# EAGLE board Micro-OLED_I2C_Mill_Humid_Test (EAGLE 7.6.0)
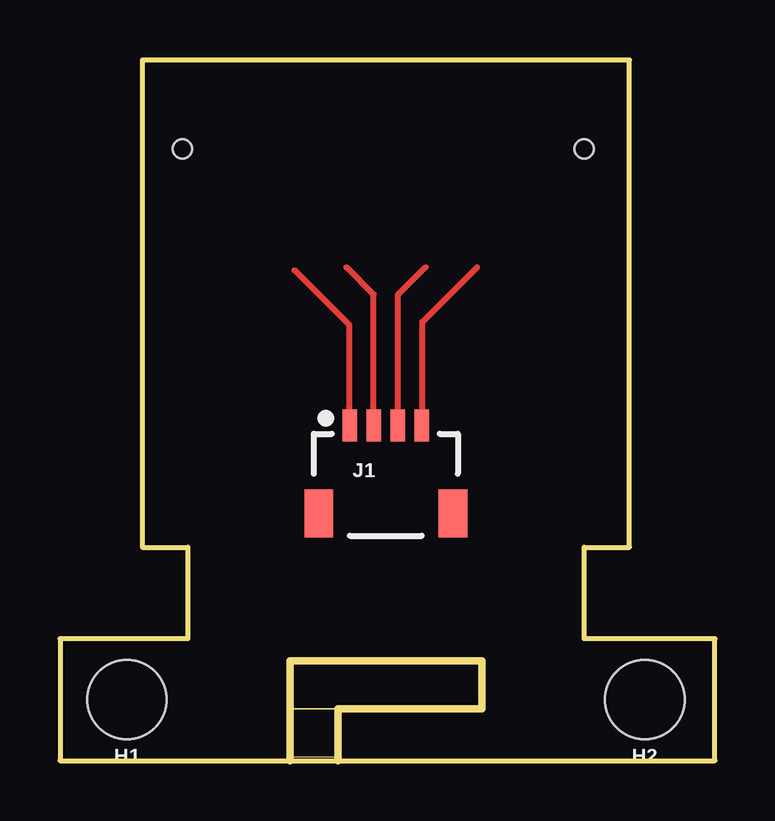
[diagram p0: board, top side]
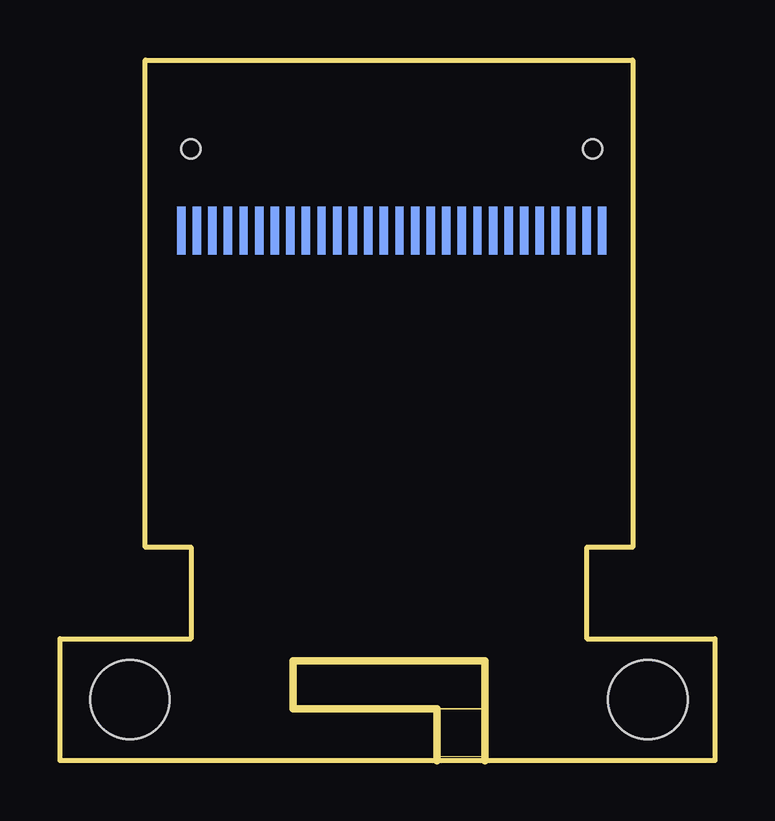
[diagram p1: board, bottom side, seen from below]

Size 27.3 x 29.21 mm. Coordinates in mm from the lower left corner, seen from the top.
Outline: 3.43,29.21 3.43,8.89 5.33,8.89 5.33,5.08 0,5.08 0,0 27.3,0 27.3,5.08 21.84,5.08 21.84,8.89 23.75,8.89 23.75,29.21 3.43,29.21
Copper layers (1*16): Top 0.035mm / dielectric 1.5mm / Bottom 0.035mm
Design rules "SparkFun-2-layer-TIGHT": minimum track width 7mil, minimum drill 15mil, track to track 7mil, track to pad 7mil, pad to pad 7mil, via to via 7mil, smd to smd 7mil, copper to edge 7mil, drill to drill 7mil, minimum pad ring 7mil, minimum via ring 7mil, stop-mask expansion 4mil, vias tented up to drill 25mil, thermal gap 10mil

## Footprints (pad centres in the part's own frame; a part is rotated, then mirrored left to right if it is on the bottom)
STAND-OFF = hole 3.302: 0,0
1X04_1MM_RA_STRESSRELIEF = smd 0.6 x 1.35: 1 -1.5,0; 2 -0.5,0; 3 0.5,0; 4 1.5,0 | smd 1.2 x 2: NC1 2.8,-3.675; NC2 -2.8,-3.675
OLED-0.66-64X48 = smd 0.35 x 2: 1 0,0; 2 0.65,0; 3 1.3,0; 4 1.95,0; 5 2.6,0; 6 3.25,0; 7 3.9,0; 8 4.55,0; 9 5.2,0; 10 5.85,0; 11 6.5,0; 12 7.15,0; 13 7.8,0; 14 8.45,0; 15 9.1,0; 16 9.75,0; 17 10.4,0; 18 11.05,0; 19 11.7,0; 20 12.35,0; 21 13,0; 22 13.65,0; 23 14.3,0; 24 14.95,0; 25 15.6,0; 26 16.25,0; 27 16.9,0; 28 17.55,0 | hole 0.8: 17.15,-3.4; 0.4,-3.4

## Placement (x,y rotation side)
FRAME1  FRAME-LETTER  [CREATIVE_COMMONS]  17.4,-19.05 0 bottom  (outside the outline)
H1  STAND-OFF  [STAND-OFF]  2.79,2.54 180 top
H2  STAND-OFF  [STAND-OFF]  24.38,2.54 180 top
J1  [1X04_1MM_RA_STRESSRELIEF]  13.59,13.97 0 top
OLED1  OLED0.66  [OLED-0.66-64X48]  4.7,22.1 180 bottom

## Library data of the parts
FRAME1 = SparkFun-Aesthetics
H1 H2 = SparkFun-Hardware
J1 = SparkX
OLED1 = microView-temp

## Nets
D0/SCK: J1.2
D1/MOSI: J1.3
GND: J1.1
VDD: J1.4

## Tracks (layer width: path | path; a pad name or v marks a point on that pad's centre or on a via)
N$1
  Top 0.254: 15.11,13.97 15.11,18.29 17.4,20.57
N$2
  Top 0.254: 14.1,13.97 14.1,19.43 15.24,20.57
N$3
  Top 0.254: 13.08,13.97 13.08,19.43 11.94,20.57
N$4
  Top 0.254: 12.06,13.97 12.06,18.16 9.78,20.45

## Text on the board
bDocu: Jim Lindblom